# Altium PCB DC-DC_12-5V.PcbDoc
Units mm, origin at the board's own origin, x right, y up, seen from the top; angles counter-clockwise.
Board outline 52 x 17.5 mm, 2 copper layers (Top Layer, Bottom Layer); 7 components, 4 nets, 19 pads, 0 vias.
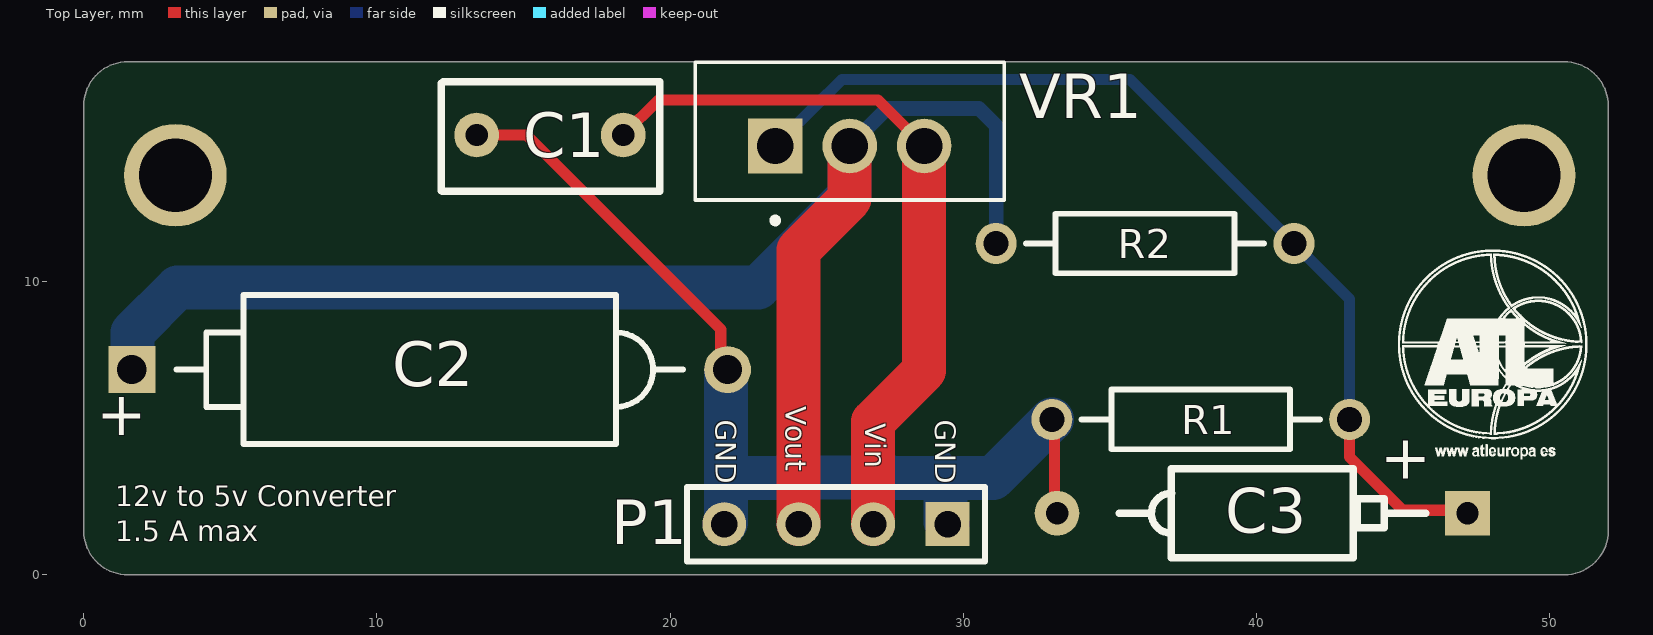
[diagram p0: Top Layer view]
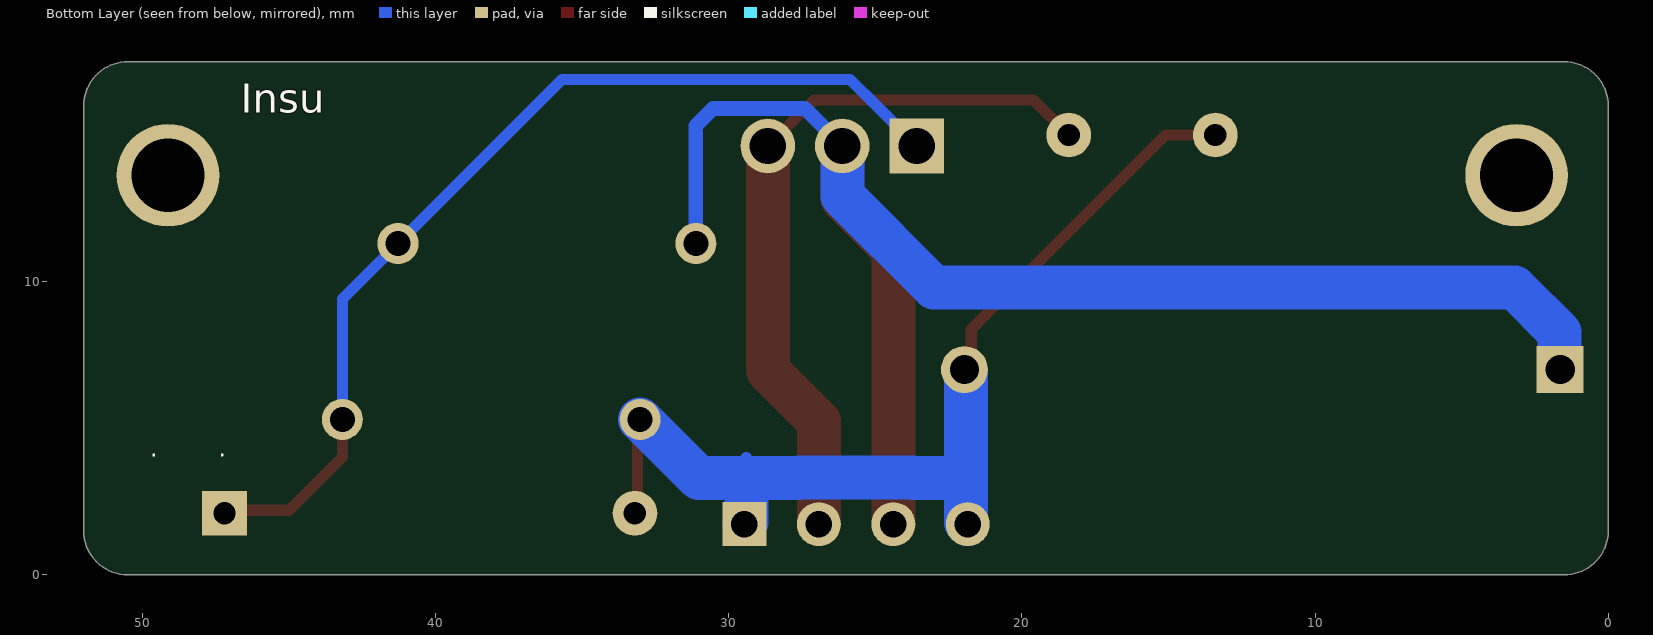
[diagram p1: Bottom Layer view, seen from below]

## Layer stack, top to bottom
Top Solder: solder mask 0.0102, Solder Resist, Dk 3.5
Top Layer: signal copper 0.0356
Dielectric 1: dielectric 0.32, FR-4, Dk 4.8
Bottom Layer: signal copper 0.0356
Bottom Solder: solder mask 0.0102, Solder Resist, Dk 3.5

## Board outline
1.5,0 cw(c1.5,1.5) 0,1.5 0,16 cw(c1.5,16) 1.5,17.5 50.5,17.5 cw(c50.5,16) 52,16 52,1.5 cw(c50.5,1.5) 50.5,0

## Design rules (kind name [scope] priority, off if disabled: settings)
Clearance [All] p1: gap=0.1 ignorepadtopadclearanceinfootprint=FALSE
DiffPairsRouting RS485_DiffPairsRouting [InDifferentialPair('RS485')] p1: maxlimit=0.25 minlimit=0.25 mostfreqgap=0.25 toplayer_minwidth=0.14 toplayer_maxwidth=0.14 toplayer_prefwidth=0.14 bottomlayer_minwidth=0.14 bottomlayer_maxwidth=0.14 bottomlayer_prefwidth=0.14 impedanceprofiledriven=TRUE impedanceprofileid={EB7CAB6C-5A75-4A25-BDF9-6303107E11B5} maxuncoupledlength=15.24
DiffPairsRouting USB_DiffPairRouting [InDifferentialPair('USB_D')] p2: maxlimit=0.254 minlimit=0.127 mostfreqgap=0.127 toplayer_minwidth=0.205 toplayer_maxwidth=0.213 toplayer_prefwidth=0.205 bottomlayer_minwidth=0.205 bottomlayer_maxwidth=0.213 bottomlayer_prefwidth=0.205 maxuncoupledlength=15.24
HoleSize HoleSize_Pad [IsPad] p1: absolutevalues=TRUE maxlimit=2539.975 minlimit=0.5 maxpercent=80.000 minpercent=20.000
HoleSize HoleSize_Via [IsVia] p2: absolutevalues=TRUE maxlimit=6.3 minlimit=0.015 maxpercent=80.000 minpercent=20.000
HoleToHoleClearance [All] p1: gap=0.2 allowstackedmicrovias=TRUE
MinimumSolderMaskSliver [All] p1: minsoldermaskwidth=0.1
PlaneConnect [All] p1: planeconnectstyle=Direct reliefexpansion=0.508 reliefentries=4 reliefconductorwidth=0.254 reliefairgap=0.254
PolygonConnect [All] p1: connectstyle=Direct reliefconductorwidth=0.254 reliefentries=4 polygonreliefangle="90 Angle" airgapwidth=0.254
RoutingVias [(InNet('K1') OR InNet('K2') OR InNet('K3') OR InNet('K4') OR InNet('K5') OR InNet('K6') OR InNet('K7') OR InNet('K8') OR InNet('K9') OR InNet('K10') OR InNet('K11') OR InNet('K12'))] p1: holewidth=0.3 width=0.4 viastyle="Through Hole" minholewidth=0.3 minwidth=0.4 maxholewidth=0.3 maxwidth=0.4
RoutingVias RoutingViasJLCPCB [All] p2: holewidth=0.5 width=0.65 viastyle="Through Hole" minholewidth=0.2 minwidth=0.35 maxholewidth=0.711 maxwidth=1.27
SilkToSilkClearance [All] p1: silktosilkclearance=0.1
SilkToSolderMaskClearance [IsPad] p1: minsilkscreentomaskgap=0.1 clearancetoexposedcopper=TRUE
SolderMaskExpansion [All] p1: expansion=0.102 istentingtop=FALSE
UnRoutedNet [All] p1: checkbadconnections=TRUE
Width "3A Width" [InNet('NetJ5_1') OR InNet('VIN')] p1 off: maxlimit=1.27 minlimit=1.27 preferedwidth=1.27 // Width necessary for 3A
Width [All] p2: maxlimit=1.5 minlimit=0.1 preferedwidth=0.254 minimp=50.000000 maximp=50.000000 favimp=50.000000
22 further rules are at their usual default settings.

## Components (designator, comment, footprint, x,y, rotation, side; value= is the part's Value field where it differs from the comment)
C1 "0.1uF" CAP_RADIAL_5mm 18.4,15 r180 top
C2 "500D106M050BA2A" POLAR0.8 11.8,7 r180 top value=10uF
C3 "4.7uF" CAP_AXIAL 47.2,2.1 r180 top
P1 "Header 4" HDR1X4 29.467,1.727 r180 top
R1 "MBE04140C6800FC100" AXIAL-0.4 38.1,5.3 r0 top value=680
R2 "MBE04140C2400FC100" AXIAL-0.4 36.2,11.3 r180 top value=240
VR1 "LM317T" TO254P1054X470X1955-3 26.127,14.627 r0 top

## Footprints (in the part's own frame and the unit in brackets; to place one, negate y for a bottom-side part, rotate by r counter-clockwise, add the part's x,y. Pads: shape width x height; smd on the part's side, far side on the other; paste and mask are expansions set on the pad)
AXIAL-0.4 [mm] "Axial Device, Thru-Hole; 2 Leads; 0.4 in Pin Spacing"
  round 1.4 hole 0.85: 1(-5.08,0) 2(5.08,0)
  silkscreen extent -4.06,-1.02 4.06,1.02
CAP_AXIAL [mil]
  rect 60x60 hole 30: 1(0,0)
  round 60 hole 30: 2(551.18,0)
  silkscreen extent 56,-60 468,60
CAP_RADIAL_5mm [mil]
  round 60 hole 30: 1(0,0) 2(196.85,0)
  silkscreen extent -49,-72 244,76, body extent -44,-69 239,69, height 319
HDR1X4 [mm] "Connector; Header; 4 Position"
  rect 1.5x1.5 hole 0.9: 1(0,0)
  round 1.5 hole 0.9: 2(2.54,0) 3(5.08,0) 4(7.62,0)
  silkscreen extent -1.27,-1.27 8.89,1.27
POLAR0.8 [mm] "Polarized Capacitor; 2 Leads"
  rect 1.6x1.6 hole 1: 1(10.16,0)
  round 1.6 hole 1: 2(-10.16,0)
  silkscreen extent -8.64,-2.54 8.64,2.54
TO254P1054X470X1955-3 [mm]
  rect 1.86x1.86 / inner round 1.86 / far side rect 1.86x1.86 hole 1.24: 1(-2.54,0)
  round 1.86 hole 1.24: 2(0,0) 3(2.54,0)
  silkscreen extent -5.27,-2.64 5.27,2.86, body extent -5.08,-1.49 5.08,2.71, height 22.86

## Part data
C1: library part BFC247086104, "Condensadores de película .1uF 5% 100volts", Package="1508 Vishay", Check_prices=https://www.snapeda.com/parts/CRCW06034K70FKEA/Vishay+Dale/view-part/?ref=eda, MF=Vishay, MP=CRCW06034K70FKEA, SnapEDA_Link=https://www.snapeda.com/parts/CRCW06034K70FKEA/Vishay+Dale/view-part/?ref=snap
C2: library part "Cap Pol2", "Polarized Capacitor (Axial)", LatestRevisionDate=17-Jul-2002, LatestRevisionNote="Re-released for DXP Platform.", PackageDescription="Polarized Capacitor; 2 Leads", PackageReference=POLAR0.8, Published=8-Jun-2000, Publisher="Altium Limited"
C3: library part MAL202190671E3, "Condensadores electrolíticos de aluminio (con terminales axiales) 4.7uF 63V 20%", Manufacturer_Name=Vishay, Manufacturer_Part_Number=MAL214699104E3, Mouser Part Number=594-MAL214699104E3, Datasheet Link=https://www.vishay.com/docs/28403/146cti.pdf, Geometry.Height=12.5mm, Mouser Price/Stock=https://www.mouser.co.uk/ProductDetail/Vishay-BC-Components/MAL214699104E3?qs=Ep9Lwju7gVqvyEnQ0FJ4Qg%3D%3D
P1: "Header, 4-Pin", LatestRevisionDate=17-Jul-2002, LatestRevisionNote="Re-released for DXP Platform.", Publisher="Altium Limited"
R1 R2: library part Res2, "Resistor", LatestRevisionDate=17-Jul-2002, LatestRevisionNote="Re-released for DXP Platform.", PackageDescription="Axial Device, Thru-Hole; 2 Leads; 0.4 in Pin Spacing", PackageReference=AXIAL-0.4, Published=8-Jun-2000, Publisher="Altium Limited"
VR1: "1.5-A, 40-V, adjustable linear voltage regulator 3-TO-220", Package="TO-220-3 Texas Instruments", Check_prices=https://www.snapeda.com/parts/LM317T/Texas+Instruments/view-part/?ref=eda, MF="Texas Instruments", MP=LM317T, SnapEDA_Link=https://www.snapeda.com/parts/LM317T/Texas+Instruments/view-part/?ref=snap

## Free pads (board coordinates)
  round 3.5 hole 2.5: P1(3.127,13.627) P2(49.127,13.627)

## Nets (pads, with @x,y where several pads share a name; then routed paths per layer and width w, separated by ;. In a path a pad name is that pad's centre, name@x,y a point inside that pad or via, vN(x,y) a via of type N, cw(c..) or ccw(c..) an arc to the next point about the centre after c; other vN are vias at no path point)
GND: C1.2 C2.2 C3.2 P1.1 P1.4 R1.1 | length 34.8
  Top Layer w0.381: C1.2 15.1,15 18,12.1 21.728,8.372 21.728,7.232 C2.2 ; R1.1 33.11,5.21 33.11,2.19 C3.2
  Bottom Layer w0.381: 29.4,4 29.467,3.933
  Bottom Layer w1.5: P1.4 21.9,1.78 21.9,3.3 ; C2.2 21.96,6.973 21.9,6.913 21.9,3.3 ; 29.4,3.3 29.4,1.794 P1.1 ; R1.1 31.02,3.3 29.467,3.3 27.617,3.3 27.59,3.327 23.724,3.327 23.697,3.3 21.9,3.3
NetC3_1: C3.1 R1.2 R2.1 VR1.1 | length 34.1
  Top Layer w0.381: R1.2 43.18,4.02 45,2.2 47.1,2.2 C3.1
  Bottom Layer w0.381: VR1.1 24.925,15.965 25.86,16.9 35.68,16.9 R2.1 43.18,9.4 R1.2 R1.2@43.002,5.478
Vin: C1.1 P1.2 VR1.3 | length 25
  Top Layer w0.381: C1.1 19.6,16.2 27.094,16.2 VR1.3
  Top Layer w1.5: P1.2 26.927,5.227 28.667,6.967 VR1.3
Vout: C2.1 P1.3 R2.2 VR1.2 | length 52.8
  Top Layer w1.5: P1.3 24.387,11.087 26.127,12.827 VR1.2
  Bottom Layer w0.5: C2.1 C2.1@1.657,7.017 ; VR1.2 27.407,15.907 30.533,15.907 31.12,15.32 R2.2
  Bottom Layer w1.5: C2.1@1.657,7.017 1.657,8.257 3.2,9.8 23,9.8 26.127,12.927 VR1.2

## Silkscreen, mask and mechanical layers (free items; w line width, h text height)
Top Overlay:
  drawing of 19 lines, arcs and shapes, not listed
  text "Vout" at 23.95,5.75 h0.7 r270
  text "GND" at 21.55,5.283 h0.7 r270
  text "GND" at 29.05,5.283 h0.7 r270
  text "Vin" at 26.65,5.167 h0.7 r270
  text "12v to 5v Converter  / 1.5 A max" at 1.082,0.9 h1.2
Bottom Overlay:
  region: 47.313,4.123 47.315,4.119 47.314,4.107 47.315,4.067 47.314,4.065 47.315,4.059 47.314,4.052 47.312,4.051 47.308,4.049 47.252,4.05 47.248,4.053 47.247,4.057 47.248,4.068 47.247,4.121 47.25,4.124 47.255,4.126 47.311,4.125 47.313,4.124
  region: 49.625,4.049 49.582,4.05 49.578,4.053 49.577,4.057 49.578,4.068 49.578,4.121 49.58,4.124 49.586,4.126 49.641,4.125 49.643,4.124 49.645,4.119 49.644,4.1 49.644,4.055 49.643,4.051 49.638,4.049 49.626,4.049
  text "Insu" at 46.646,15.754 h1
Mechanical 1:
  the board outline again, w0.254

## Text inside footprints (layer, text, board x,y; h text height)
C2: Top Overlay "+" at 2.148,6.05 h1.5 r180
C3: Top Overlay "+" at 45.966,4.58 h1.52 r180